# Altium PCB PCB_YMF288-M MegaMod v0.42_2023-11-11.pcbdoc
Units mil, origin at the board's own origin, x right, y up, seen from the top; angles counter-clockwise.
Board outline 3884.22 x 3759.95 mil, 2 copper layers (Top Layer, Bottom Layer); 34 components, 49 nets, 173 pads, 12 vias.
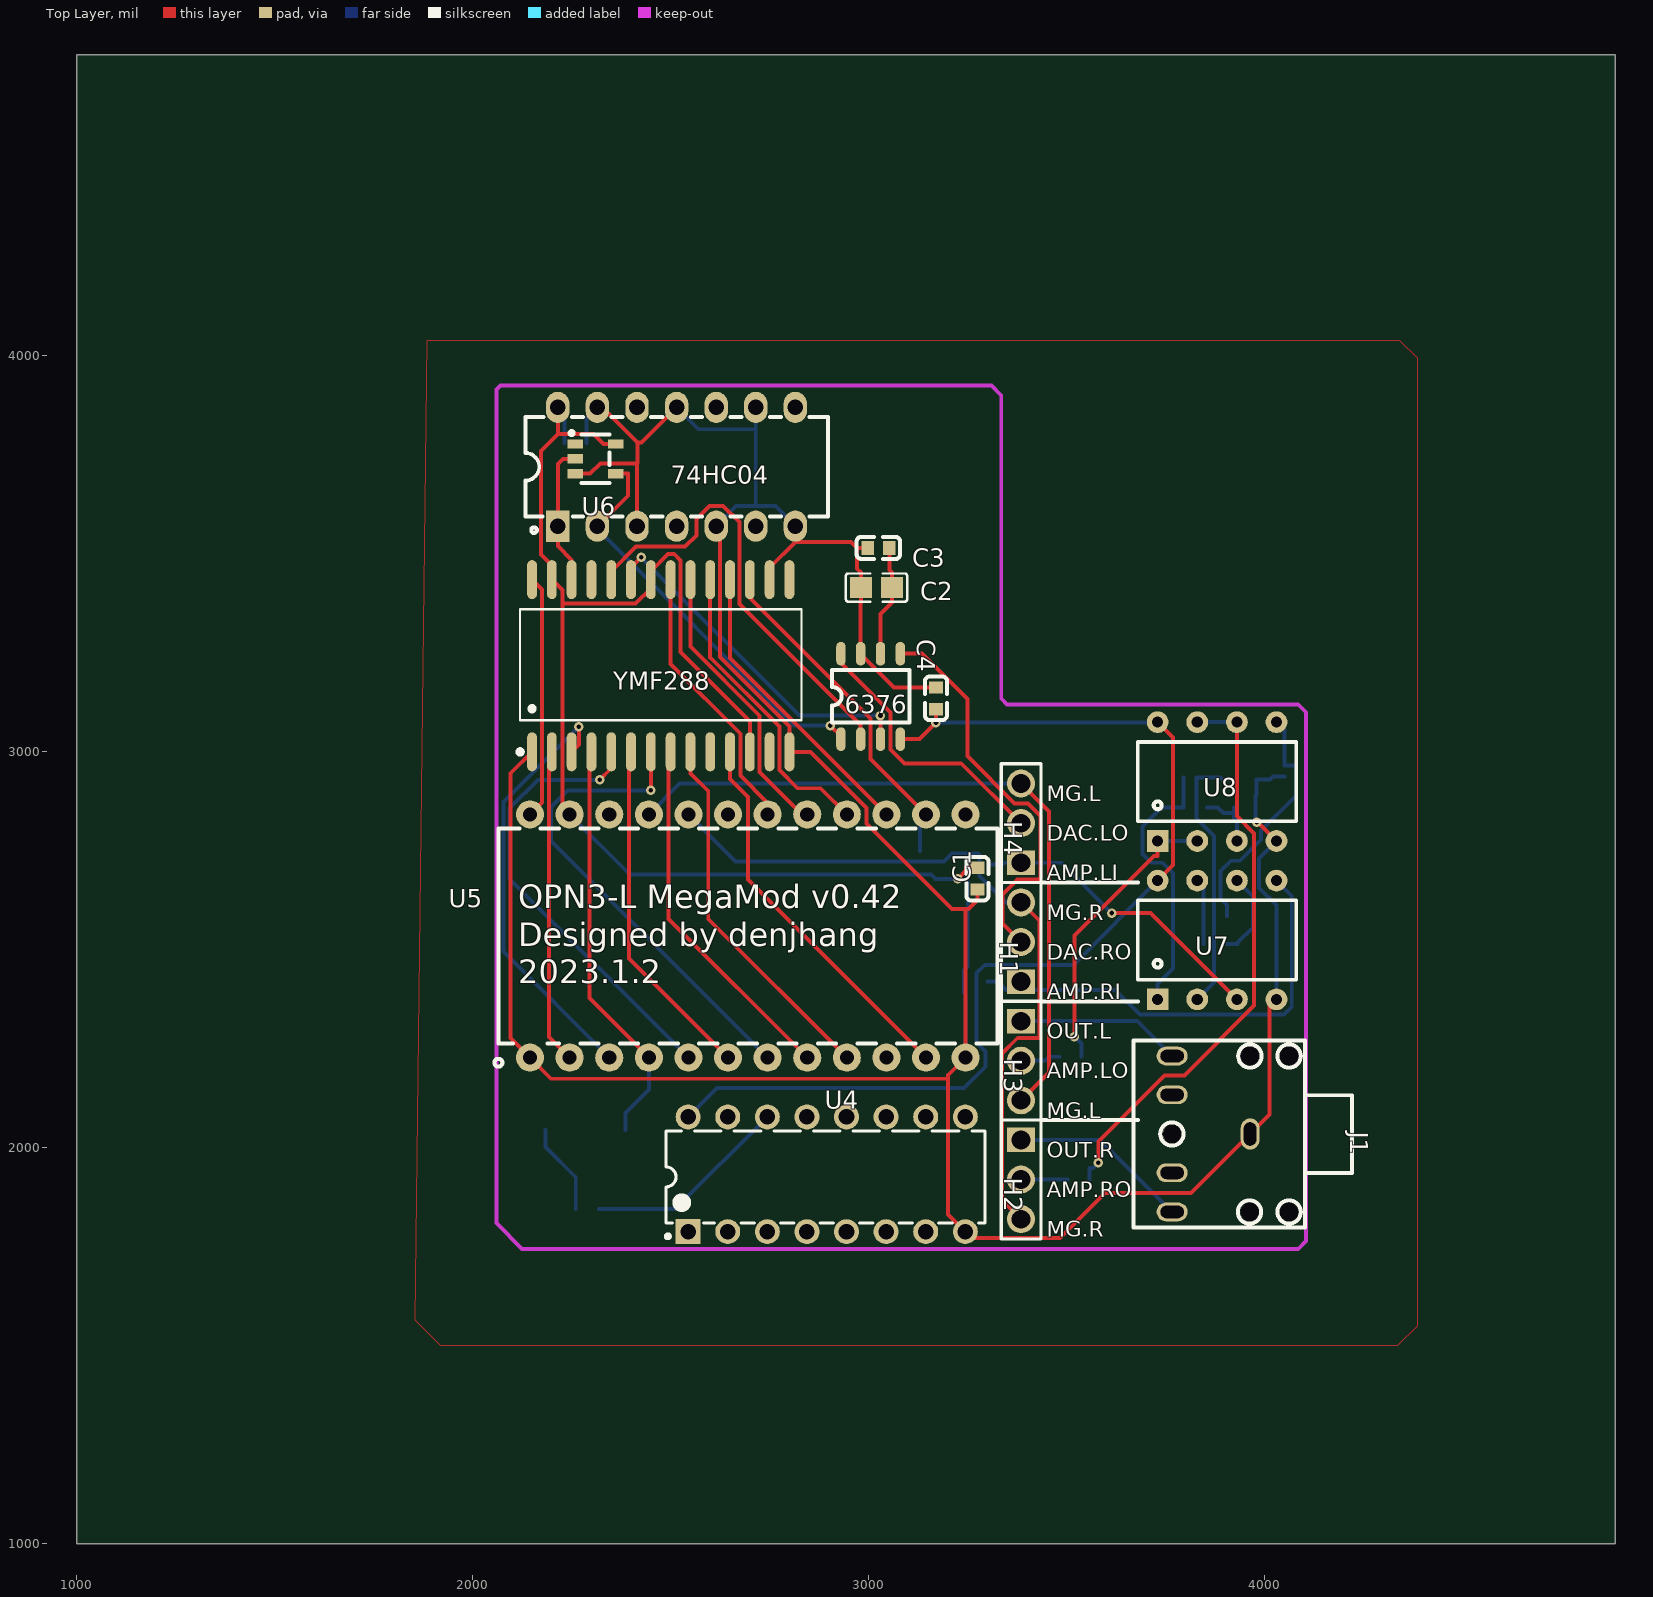
[diagram p0: Top Layer view]
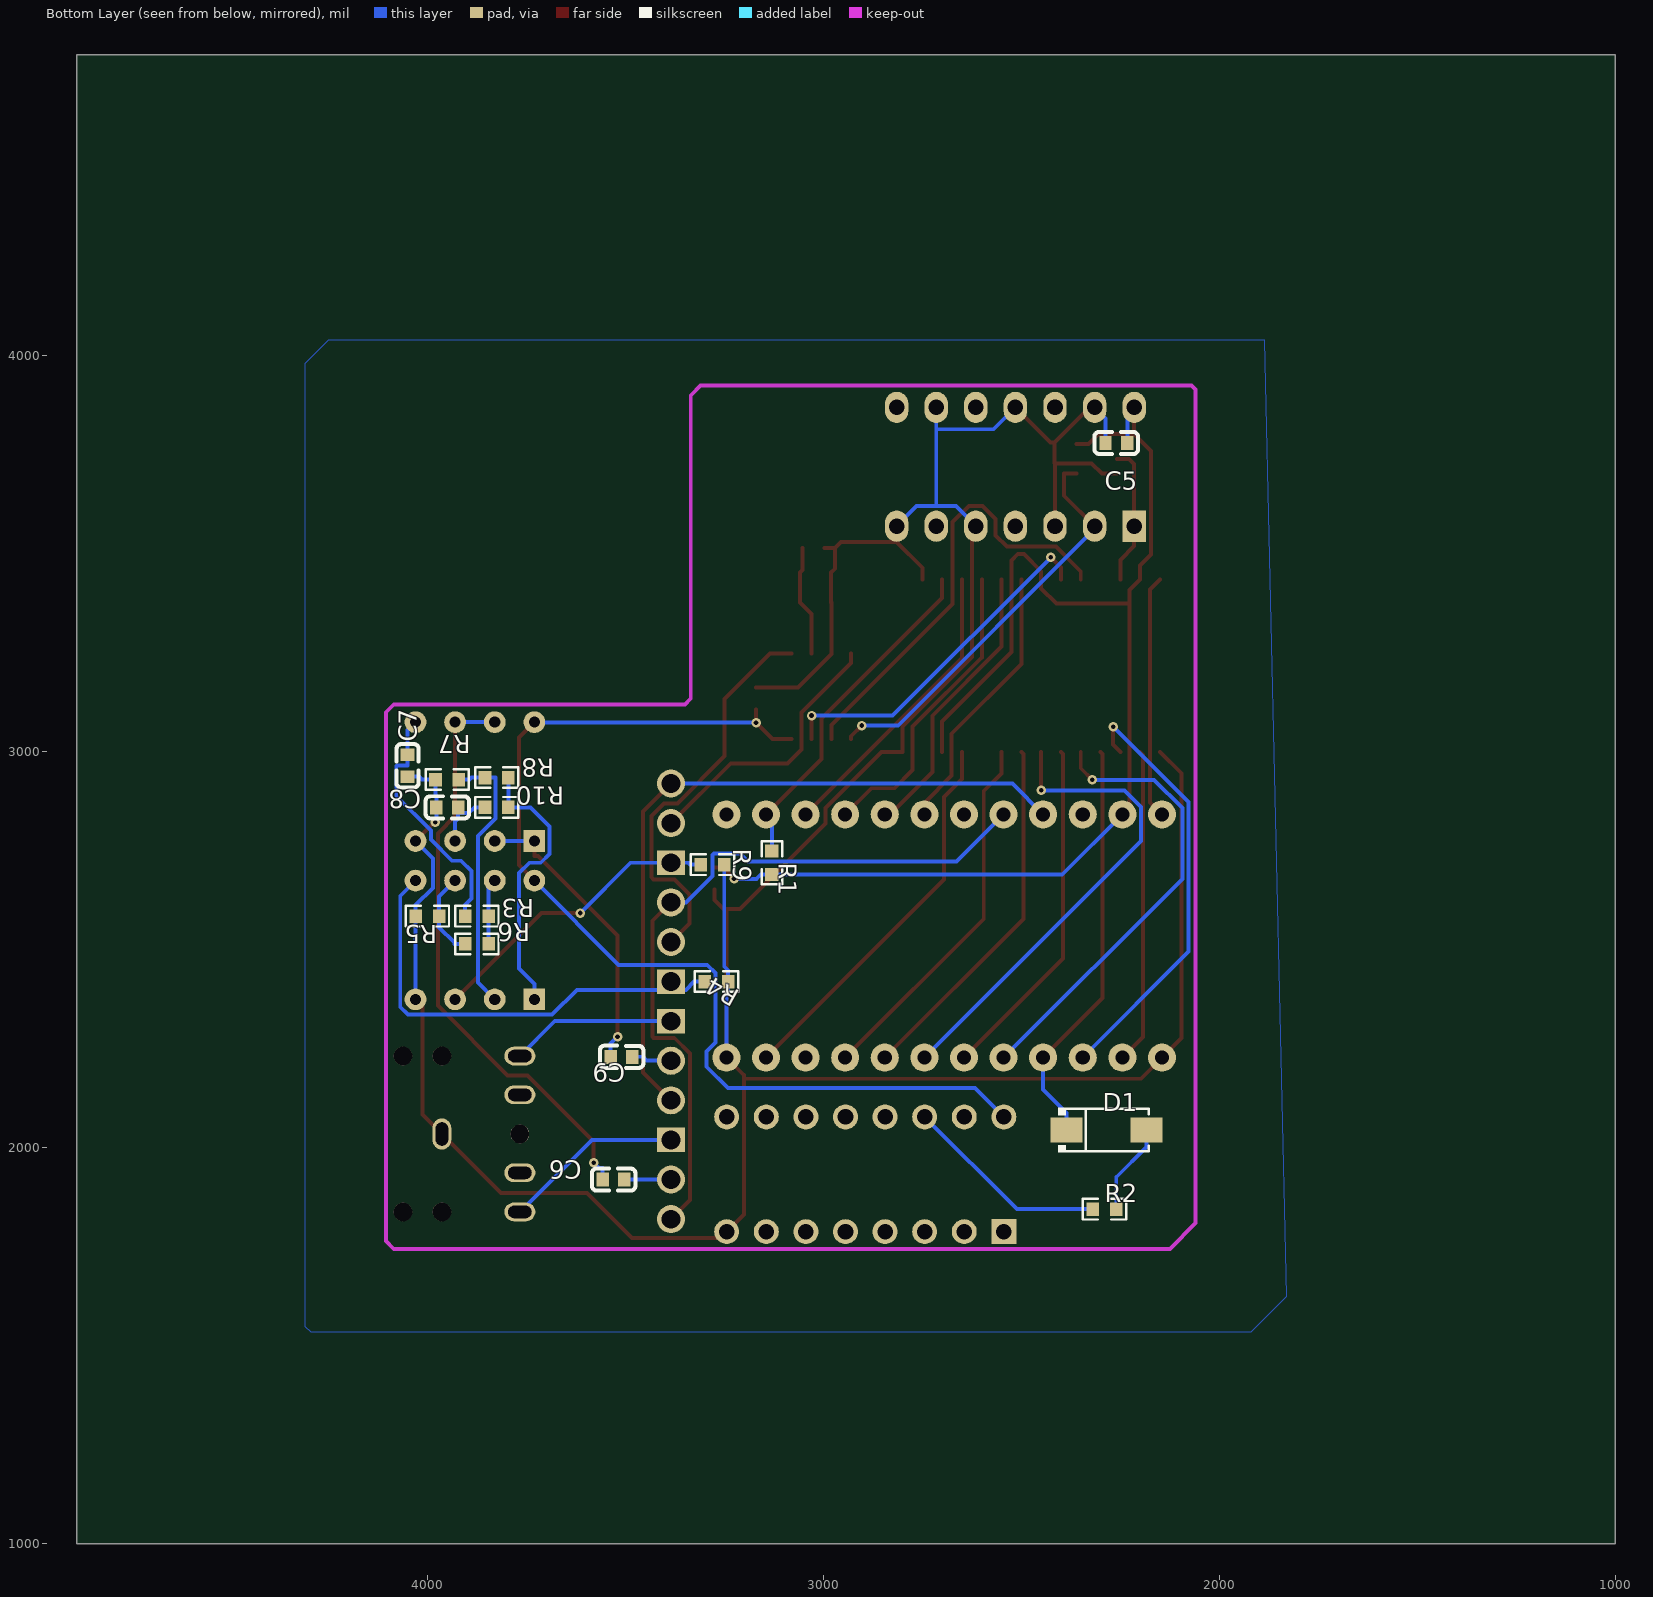
[diagram p1: Bottom Layer view, seen from below]

## Layer stack, top to bottom
Top Layer: signal copper (thickness not stored)
Dielectric: dielectric 12.6, FR-4, Dk 4.8
Bottom Layer: signal copper (thickness not stored)

## Board outline
4884.22,1000 1000,1000 1000,4759.95 4884.22,4759.95

## Components (designator, comment, footprint, x,y, rotation, side; value= is the part's Value field where it differs from the comment)
74HC04 "MegaGRRL IC-DCSG" DIP-14_L19.4-W6.4-P2.54-LS7.6-BL 2514.22,3720 r0 top
6376 "uPD6379GR" SOIC-8_L5.0-W4.0-P1.27-LS6.0-BL 3004.22,3140 r0 top
C1 "0.1u" C0603#1 3274.22,2680 r90 top
C2 "0.1u" C0805 3019.22,3415 r0 top
C3 "0.1u" C0603#1 3024.22,3515 r0 top
C4 "0.1u" C0603#1 3169.22,3135 r270 top
C5 "0.1u" C0603#2 2259.22,3780 r0 bottom
C6 "10n" C0603#2 3529.22,1920 r180 bottom
C7 "10n" C0603#2 4049.22,2965 r270 bottom
C8 "10n" C0603#2 3949.22,2860 r180 bottom
C9 "4.7u" C0603#2 3509.22,2230 r180 bottom
D1 "SS14" SMA_L4.4-W2.8-LS5.4-RD 2284.22,2045 r0 bottom
H1 "Header-Male-2.54_1x3" HDR-TH_3P-P2.54-V-M-1 3384.22,2520 r90 top
H2 "Header-Male-2.54_1x3" HDR-TH_3P-P2.54-V-M-1 3384.22,1920 r270 top
H3 "Header-Male-2.54_1x3" HDR-TH_3P-P2.54-V-M-1 3384.22,2220 r270 top
H4 "Header-Male-2.54_1x3" HDR-TH_3P-P2.54-V-M-1 3384.22,2820 r90 top
J1 "PJ-307C" AUDIO-TH_PJ307C 3864.22,2035 r270 top
R1 "62k" R0603 3129.22,2720 r90 bottom
R2 "1k" R0603 2289.22,1845 r0 bottom
R3 "3.6k" R0603 3874.22,2585 r180 bottom
R4 "10k" R0603 3269.22,2420 r180 bottom
R5 "15k" R0603 3999.22,2585 r180 bottom
R6 "3.9k" R0603 3874.22,2515 r180 bottom
R7 "15k" R0603 3949.22,2930 r180 bottom
R8 "3.9k" R0603 3824.22,2935 r180 bottom
R9 "10k" R0603 3279.22,2715 r0 bottom
R10 "3.6k" R0603 3824.22,2860 r180 bottom
U4 "MegaGRRL IC-DCSG" DIP-16_L20.4-W5.8-P2.54-LS7.6-BL 2893.42,1933.19 r0 top
U5 "MegaGRRL IC-FM" DIP-24_L32.0-W13.8-P2.54-LS15.6-BL 2694.22,2535 r0 top
U6 "SA5532AP" SOT-23-5_L3.0-W1.7-P0.95-LS2.8-BR 2309.22,3740 r180 top
U7 "SA5532AP" DIP8 3879.22,2525 r0 top
U8 "SA5532AP" DIP8 3879.22,2925 r0 top
YMF288 "YMF288-M" SOP-28-YMF288 2474.22,3220 r0 top
? "" ? 1780.61,3568.97 r0 top

## Footprints (in the part's own frame and the unit in brackets; to place one, negate y for a bottom-side part, rotate by r counter-clockwise, add the part's x,y. Pads: shape width x height; smd on the part's side, far side on the other; paste and mask are expansions set on the pad)
AUDIO-TH_PJ307C [mm]
  oval 2x1.2 hole 0.8 slot 1.5 at 0 deg paste+0 mask+0.051: 1(0,2.5)
  oval 1.2x2 hole 0.8 slot 1.5 at 90 deg paste+0 mask+0.051: 2(5,-2.5) 3(2.489,-2.5) 4(-2.511,-2.5) 5(-5,-2.5)
  round 1.2 hole 1.2 unplated paste+0: ""(-5,2.5) ""(-5,5) ""(0,-2.5) ""(5,2.5) ""(5,5)
  silkscreen extent -6.01,-4.99 5.99,9.03
C0603#1 [mm]
  rect 0.8x0.9 smd paste+0 mask+0.051: 1(-0.7,0) 2(0.7,0)
  silkscreen extent -1.41,-0.71 1.39,0.72
C0603#2 [mm]
  rect 0.8x0.9 smd paste+0 mask+0.051: 1(0.7,0) 2(-0.7,0)
  silkscreen extent -1.39,-0.72 1.41,0.71
C0805 [mm]
  rect 1.41x1.35 smd paste-100 mask+0.051: 1(-1,0) 2(1,0)
  silkscreen extent -1.96,-0.9 1.96,0.9
DIP8 [mil]
  rect 55x55 hole 28 paste+0 mask+2: 1(-150,-150)
  round 55 hole 28 paste+0 mask+2: 2(-50,-150) 3(50,-150) 4(150,-150) 5(150,150) 6(50,150) 7(-50,150) 8(-150,150)
  silkscreen extent -200,-100 200,100
DIP-14_L19.4-W6.4-P2.54-LS7.6-BL [mm]
  rect 1.5x2 hole 1 paste+0 mask+0.051: 1(-7.62,-3.811)
  oval 1.5x2 hole 1 paste+0 mask+0.051: 2(-5.08,-3.811) 3(-2.54,-3.811) 4(0,-3.811) 5(2.54,-3.811) 6(5.08,-3.811) 7(7.62,-3.811) 8(7.62,3.811) 9(5.08,3.809) 10(2.54,3.809) 11(0,3.809) 12(-2.54,3.809) 13(-5.08,3.809) 14(-7.62,3.809)
  silkscreen extent -9.7,-4.24 9.7,3.2
DIP-16_L20.4-W5.8-P2.54-LS7.6-BL [mm]
  rect 1.6x1.6 hole 1 paste+0 mask+0.051: 1(-8.89,-3.68)
  round 1.6 hole 1 paste+0 mask+0.051: 2(-6.35,-3.68) 3(-3.81,-3.68) 4(-1.27,-3.68) 5(1.27,-3.68) 6(3.81,-3.68) 7(6.35,-3.68) 8(8.89,-3.68) 9(8.89,3.68) 10(6.35,3.68) 11(3.81,3.68) 12(1.27,3.68) 13(-1.27,3.68) 14(-3.81,3.68) 15(-6.35,3.68) 16(-8.89,3.68)
  silkscreen extent -10.31,-4.1 10.16,2.77
DIP-24_L32.0-W13.8-P2.54-LS15.6-BL [mm]
  round 1.8 hole 0.9 paste+0 mask+0.051: 1(-13.97,-7.8) 2(-11.43,-7.8) 3(-8.89,-7.8) 4(-6.35,-7.8) 5(-3.81,-7.8) 6(-1.27,-7.8) 7(1.27,-7.8) 8(3.81,-7.8) 9(6.35,-7.8) 10(8.89,-7.8) 11(11.43,-7.8) 12(13.97,-7.8) 13(13.97,7.8) 14(11.43,7.8) 15(8.89,7.8) 16(6.35,7.8) 17(3.81,7.8) 18(1.27,7.8) 19(-1.27,7.8) 20(-3.81,7.8) 21(-6.35,7.8) 22(-8.89,7.8) 23(-11.43,7.8) 24(-13.97,7.8)
  silkscreen extent -16.26,-8.38 16,6.9
HDR-TH_3P-P2.54-V-M-1 [mm]
  rect 1.575x1.8 hole 1.2 paste+0 mask+0.051: 1(-2.54,0)
  round 1.8 hole 1.2 paste+0 mask+0.051: 2(0,0) 3(2.54,0)
  silkscreen extent -3.81,-1.27 3.81,1.27
R0603 [mil]
  rect 31.75x34.02 smd paste-3937.01 mask+2: 1(29.66,0) 2(-29.66,0)
  silkscreen extent -55,-26 55,26
SMA_L4.4-W2.8-LS5.4-RD [mm]
  rect 2.046x1.62 smd paste+0 mask+0.051: 1(2.566,0) 2(-2.565,0)
  silkscreen extent -2.7,-1.44 3.08,1.44
SOIC-8_L5.0-W4.0-P1.27-LS6.0-BL [mm]
  oval 0.6x1.52 smd paste+0 mask+0.102: 1(-1.905,-2.74) 2(-0.635,-2.74) 3(0.635,-2.74) 4(1.905,-2.74) 5(1.905,2.74) 6(0.635,2.74) 7(-0.635,2.74) 8(-1.905,2.74)
  silkscreen extent -2.49,-1.67 2.5,1.7
SOP-28-YMF288 [mm]
  oval 0.63x2.5 smd paste+0 mask+0.051: 1(-8.255,-5.588) 2(-6.985,-5.588) 3(-5.715,-5.588) 4(-4.445,-5.588) 5(-3.175,-5.588) 6(-1.905,-5.588) 7(-0.635,-5.588) 8(0.635,-5.588) 9(1.905,-5.588) 10(3.175,-5.588) 11(4.445,-5.588) 12(5.715,-5.588) 13(6.985,-5.588) 14(8.255,-5.588) 15(8.255,5.461) 16(6.985,5.461) 17(5.715,5.461) 18(4.445,5.461) 19(3.175,5.461) 20(1.905,5.461) 21(0.635,5.461) 22(-0.635,5.461) 23(-1.905,5.461) 24(-3.175,5.461) 25(-4.445,5.461) 26(-5.715,5.461) 27(-6.985,5.461) 28(-8.255,5.461)
  silkscreen extent -9.17,-5.74 9.03,3.57
SOT-23-5_L3.0-W1.7-P0.95-LS2.8-BR [mm]
  rect 1x0.6 smd paste+0 mask+0.051: 1(1.3,-0.95) 2(1.3,0) 3(1.3,0.95) 4(-1.3,0.95) 5(-1.3,-0.95)
  silkscreen extent -0.9,-1.78 1.65,1.55
? [mil]

## Via types
v1: diameter 24.02, hole 12.01, Top Layer to Bottom Layer, tented both sides, 12 vias

## Nets (pads, with @x,y where several pads share a name; then routed paths per layer and width w, separated by ;. In a path a pad name is that pad's centre, name@x,y a point inside that pad or via, vN(x,y) a via of type N, cw(c..) or ccw(c..) an arc to the next point about the centre after c; other vN are vias at no path point)
/CS: R1.1 U5.14 YMF288.17 | length 875.9
  Top Layer w10: YMF288.17 2699.22,3388.87 3004.22,3083.87 3004.22,2982.09 U5.14
  Bottom Layer w10: R1.1 3129.22,2827.09 U5.14
/IC: U5.11 YMF288.11 | length 977.1
  Top Layer w10: YMF288.11 2649.22,2931.28 2694.22,2886.28 2694.22,2677.91 U5.11
/LRO: 74HC04.2 6376.1 U6.4 | length 1041.6
  Top Layer w10: 74HC04.2 2391.08,3646.84 2391.08,3702.6 U6.4 ; v1(2902.15,3066.46) 2929.22,3039.39 6376.1
  Bottom Layer w10: 74HC04.2 2314.22,3562.44 2810.2,3066.46 v1(2902.15,3066.46)
/RD: U5.16 YMF288.19 | length 770
  Top Layer w10: YMF288.19 2599.22,3238.85 2774.22,3063.85 2774.22,2953.73 2819.84,2908.11 2878.2,2908.11 U5.16
/WR: U5.15 YMF288.18 | length 756.5
  Top Layer w10: YMF288.18 2649.22,3237.09 U5.15
A0: U5.17 YMF288.20 | length 722.7
  Top Layer w10: YMF288.20 2549.22,3266.16 2724.22,3091.16 2724.22,2949.14 2831.27,2842.09 U5.17
A1: U5.18 YMF288.21 | length 694.4
  Top Layer w10: YMF288.21 2499.22,3222.26 2675.78,3045.7 2675.78,2939.84 2744.22,2871.4 U5.18
A.VCC: 6376.4 C4.2 U4.16 U7.8 U8.8 | length 2737.8
  Top Layer w10: 6376.4 3127.7,3032.13 v1(3169.22,3073.65) 3169.22,3080.7 C4.2 ; U7.8 3768.02,2713.8 3768.02,3036.2 U8.8
  Bottom Layer w10: U4.16 2615.95,2150.6 3240.61,2150.6 3294.85,2204.84 3294.85,2243.65 3271.96,2266.54 3271.96,2441.57 3292.51,2462.12 3516.34,2462.12 U7.8 ; v1(3169.22,3073.65) 3727.87,3073.65 U8.8
BCO: 6376.3 YMF288.23 | length 896.3
  Top Layer w10: YMF288.23 2399.22,3465.61 v1(2424.92,3491.31) ; 6376.3 v1(3029.22,3091.64)
  Bottom Layer w10: v1(2424.92,3491.31) 2824.59,3091.64 v1(3029.22,3091.64)
C7_2: C7.2 R3.2 U8.5 | length 625.1
  Bottom Layer w10: R3.2 3903.88,2613 3887.52,2629.36 3887.52,2698.65 3913.87,2725 3937.07,2725 3990.68,2778.61 3990.68,2801.15 4077.98,2888.45 4077.98,2963.8 4075.96,2965.82 4049.22,2965.82 C7.2 4049.22,3055 U8.5
C8_1: C8.1 R10.2 U8.3 | length 161.9
  Bottom Layer w10: R10.2 3880.74,2860 3895.09,2845.65 C8.1@3921.66,2845.65 ; C8.1 C8.1@3921.66,2845.65 ; U8.3 3929.22,2823.73 3921.66,2831.29 C8.1@3921.66,2845.65
D0: U5.2 YMF288.2 | length 796.8
  Top Layer w10: YMF288.2 2191.89,2992.67 2191.89,2280.24 U5.2
D1: U5.3 YMF288.3 | length 1096.4
  Top Layer w10: YMF288.3 2267.43,3018.21 v1(2267.43,3063.52)
  Bottom Layer w10: v1(2267.43,3063.52) 2076.75,2872.84 2076.75,2495.38 U5.3
D1_2: D1.2 R2.2 | length 231.6
  Bottom Layer w10: D1.2 2183.22,2002.12 2259.56,1925.78 R2.2
D2: D1.1 U5.4 YMF288.4 | length 1043.6
  Top Layer w10: YMF288.4 2294.22,2995 2294.22,2377.91 U5.4
  Bottom Layer w10: D1.1 2385.22,2087.88 2444.22,2146.88 U5.4
D3: U5.5 YMF288.5 | length 1156.6
  Top Layer w10: v1(2319.92,2929.38) 2349.22,2958.68 YMF288.5
  Bottom Layer w10: v1(2319.92,2929.38) 2163.98,2929.38 2092.79,2858.19 2092.79,2679.34 U5.5
D4: U5.6 YMF288.6 | length 877.7
  Top Layer w10: YMF288.6 2394.22,2995 2394.22,2477.91 U5.6
D5: U5.7 YMF288.7 | length 1226.1
  Top Layer w10: v1(2449.22,2902.96) YMF288.7
  Bottom Layer w10: v1(2449.22,2902.96) 2238.97,2902.96 2197.3,2861.29 2197.3,2774.83 U5.7
D6: U5.8 YMF288.8 | length 919.1
  Top Layer w10: YMF288.8 2494.22,2995 2494.22,2577.91 U5.8
D7: U5.9 YMF288.9 | length 935.7
  Top Layer w10: YMF288.9 2549.22,2945.64 2594.22,2900.64 2594.22,2577.91 U5.9
DO: 6376.2 YMF288.24 | length 1128.9
  Top Layer w10: YMF288.24 2349.22,3455.5 2412.14,3518.42 2535.89,3518.42 2564.2,3546.73 2564.2,3587.9 2597.74,3621.44 2631.3,3621.44 2672.66,3580.08 2672.66,3373.95 2979.22,3067.39 6376.2
GND: 74HC04.3 74HC04.5 74HC04.7 74HC04.9 74HC04.11 74HC04.13 6376.7 C1.1 C2.1 C3.1 C4.1 C5.1 C7.1 C8.2 J1.1 R4.1 R5.2 R7.2 R9.2 U4.8 U5.1 U5.12 U6.3 U7.4 U8.4 YMF288.1 YMF288.14 YMF288.16 | length 8788.9
  Top Layer w10: YMF288.1 2095.19,2945.97 2095.19,2276.94 U5.1 2197.6,2174.53 3199.69,2174.53 ; U6.3 2295.64,3702.6 2321.62,3728.58 2414.22,3728.58 ; 74HC04.13 2327.47,3869.98 2415.66,3781.79 ; 74HC04.3 2414.22,3728.58 ; 74HC04.11 2426.03,3781.79 2415.66,3781.79 ; 74HC04.5 2624.22,3559.98 2624.22,3239.4 2799.22,3064.4 YMF288.14 2852.17,3000 2994.22,2857.95 2994.22,2818.99 3210.08,2603.13 3244.22,2603.13 ; YMF288.16 2749.22,3465.02 2814.22,3530.02 ; 74HC04.7 2814.22,3530.02 ; C3.1 2969.92,3515 ; C4.1 3063.51,3162.56 2979.22,3246.85 6376.7 2979.22,3376.81 2979.85,3377.44 2979.85,3396.22 C2.1 2979.85,3452.57 2969.92,3462.5 2969.92,3515 ; C1.1 3274.22,2625.7 3251.65,2603.13 3244.22,2603.13 ; v1(3979.3,2822.39) 3981.83,2822.39 U8.4 ; U7.4 4011.87,2357.65 4011.87,2084.22 J1.1 3813.5,1885.85 3596.49,1885.85 3482.81,1772.17 3259.56,1772.17 U4.8 3199.69,1832.04 3199.69,2174.53 ; 2414.22,3728.58 2415.66,3730.02 2415.66,3781.79 ; 2814.22,3530.02 2954.9,3530.02 2969.92,3515 ; 3199.69,2174.53 3199.69,2183.38 U5.12 3244.22,2603.13
  Bottom Layer w10: C5.1 2286.78,3842.54 74HC04.13 ; 74HC04.11 2569.46,3814.74 2714.22,3814.74 ; 74HC04.5 2664.62,3620.38 2714.22,3620.38 ; 74HC04.9 2714.22,3814.74 ; 74HC04.7 2763.82,3620.38 2714.22,3620.38 ; U5.12 3244.22,2387.34 3239.56,2392 R4.1 3239.56,2448 3249.56,2458 R9.2 ; v1(3979.3,2822.39) 3976.78,2824.91 C8.2 3976.78,2888.71 3978.88,2890.81 R7.2 4013.07,2930 4020.51,2937.44 C7.1 ; U7.4 4028.88,2375.34 R5.2 4028.88,2613 3985.44,2656.44 3985.44,2731.22 U8.4 ; 2714.22,3620.38 2714.22,3814.74
H2_2: C6.1 H2.2 | length 117.4
  Bottom Layer w10: H2.2 C6.1
H3_2: C9.1 H3.2 | length 101.6
  Bottom Layer w10: H3.2 3444.92,2220 3454.92,2230 C9.1
IN.L: H3.3 H4.3 U5.21 | length 1830.7
  Top Layer w10: H3.3 3454.73,2190.51 3454.73,2849.49 H4.3
  Bottom Layer w10: U5.21 2522.13,2920 H4.3
IN.R: H1.3 H2.3 U5.20 | length 1888.6
  Top Layer w10: H2.3 3336.34,1867.88 3336.34,2238.42 3375.88,2277.96 3427.78,2277.96 3430.69,2280.87 3430.69,2573.53 H1.3
  Bottom Layer w10: U5.20 2663.57,2722.74 3189.96,2722.74 3210.27,2743.05 3276.14,2743.05 3279.05,2740.14 3279.05,2686.81 3345.86,2620 H1.3
LOUT: 6376.8 H4.2 | length 700.4
  Top Layer w10: 6376.8 2929.22,3224.23 3054.28,3099.17 3054.28,3006.5 3089.74,2971.04 3233.18,2971.04 H4.2
LRO: 74HC04.1 U6.2 YMF288.26 | length 355.6
  Top Layer w10: YMF288.26 2249.22,3484.62 2214.22,3519.62 74HC04.1 2214.22,3726.86 2227.36,3740 U6.2
MCLK: U5.24 YMF288.28 | length 615.7
  Top Layer w10: U5.24 2174.22,2872.09 2174.22,3410 YMF288.28
OUT.L: H3.1 J1.5 | length 418.1
  Bottom Layer w10: H3.1 3677.65,2320 J1.5
OUT.R: H2.1 J1.2 | length 456.9
  Bottom Layer w10: H2.1 3583.95,2020 J1.2
R2_1: R2.1 U4.14 | length 521.1
  Bottom Layer w10: R2.1 2510.35,1845 U4.14
R3_1: R3.1 R6.1 U7.7 | length 166.4
  Bottom Layer w10: U7.7 3844.56,2659.66 R3.1 R6.1
R10_1: R8.1 R10.1 U7.1 | length 700.9
  Bottom Layer w10: U7.1 3729.22,2413.49 3768.25,2452.52 3768.25,2693.62 3741.85,2720.02 3713.07,2720.02 3690.68,2742.41 3690.68,2812.03 3738.65,2860 R10.1 3794.56,2907 R8.1
ROUT: 6376.5 H1.2 | length 1016.1
  Top Layer w10: 6376.5 3133.89,3247.87 3248.75,3133.01 3248.75,2989.29 3368.04,2870 3401.44,2870 3433.23,2838.21 3433.23,2683.33 3427.78,2677.88 3375.12,2677.88 3337.35,2640.11 3337.35,2566.87 H1.2
S$20340: 
S$25961: 
S$25965: 
S$25969: 
S$25976: 
S$26503: 
U1_6: 6376.6 C2.2 C3.2 | length 282.1
  Top Layer w10: 6376.6 3029.22,3348.07 3058.59,3377.44 C2.2 3058.59,3452.57 3051.78,3459.38 C3.2
U7_2: R7.1 R8.2 U7.2 | length 690.6
  Bottom Layer w10: U7.2 3871.48,2417.26 3871.48,2787.27 3826.96,2831.79 3826.96,2934.95 3827.01,2935 R8.2 3887.7,2935 3892.7,2930 R7.1
U7_3: H4.1 R9.1 U7.3 | length 767
  Top Layer w10: v1(3613.04,2592.93) 3711.29,2592.93 U7.3
  Bottom Layer w10: R9.1 3335.74,2715 3337.8,2717.06 3337.8,2720 H4.1 3485.97,2720 v1(3613.04,2592.93)
U7_5: H1.1 R4.2 U7.5 | length 1168.3
  Bottom Layer w10: R4.2 3325.74,2420 3346.73,2399.01 H1.1@3384.22,2399.01 ; H1.1 H1.1@3384.22,2399.01 ; U7.5 4067.85,2636.37 4067.85,2355.32 4048.75,2336.22 3684.12,2336.22 3621.33,2399.01 H1.1@3384.22,2399.01
U7_6: R5.1 R6.2 U7.6 | length 219.6
  Bottom Layer w10: R6.2 3930.74,2515 3930.74,2518.18 3969.56,2557 R5.1 3969.56,2634.66 U7.6
U8_1: C9.2 U8.1 U8.2 | length 745
  Top Layer w10: v1(3519.06,2280.84) 3519.06,2535.97 3719.6,2736.51 3729.22,2736.51 U8.1
  Bottom Layer w10: v1(3519.06,2280.84) 3536.78,2263.12 C9.2 ; U8.1 U8.2
U8_6: C6.2 U8.6 U8.7 | length 1480.4
  Top Layer w10: v1(3579.45,1962.07) 3579.45,2015.82 3746.48,2182.85 3796.66,2182.85 3972.97,2359.16 3972.97,2793.96 3929.22,2837.71 U8.6
  Bottom Layer w10: C6.2 3556.78,1948.71 3566.09,1948.71 v1(3579.45,1962.07) ; U8.7 U8.6
VCC: 74HC04.14 C1.2 C5.2 R1.2 U5.23 U6.5 YMF288.12 YMF288.22 YMF288.27 | length 3381
  Top Layer w10: 74HC04.14 2214.22,3802.68 ; U5.23 2225.78,2860.53 2225.78,3374.25 ; U6.5 2329.73,3777.4 2304.45,3802.68 2214.22,3802.68 ; YMF288.12 2699.22,3077.22 2524.21,3252.23 2524.21,3483.54 2508.37,3499.38 2492.5,3499.38 2449.22,3456.1 YMF288.22 2449.22,3412.71 2410.76,3374.25 2225.78,3374.25 ; v1(3224.76,2679.52) 3245.51,2700.27 3245.51,2707.56 C1.2 ; 2214.22,3802.68 2171.64,3760.1 2171.64,3498.01 2199.22,3470.43 YMF288.27 2225.78,3408.44 2225.78,3374.25
  Bottom Layer w10: 74HC04.14 2231.66,3852.54 C5.2 ; U5.23 2395.97,2690.34 R1.2 3157.22,2690.34 3168.04,2679.52 v1(3224.76,2679.52)
pads on no net: 74HC04.4 74HC04.6 74HC04.8 74HC04.10 74HC04.12 J1. J1.3 J1.4 U4.1 U4.2 U4.3 U4.4 U4.5 U4.6 U4.7 U4.9 U4.10 U4.11 U4.12 U4.13 U4.15 U5.10 U5.13 U5.19 U5.22 U6.1 YMF288.10 YMF288.13 YMF288.15 YMF288.25

## Polygon pours and split planes (outlines as drawn)
GND on Bottom Layer (solid): 1884.22,4040 4249.22,4040 4309.22,3980 4309.22,1550 4294.22,1535 1919.22,1535 1829.22,1625
GND on Top Layer (solid): 1884.22,4040 4339.22,4040 4384.22,3995 4384.22,1550 4334.22,1500 1919.22,1500 1854.22,1565

## Silkscreen, mask and mechanical layers (free items; w line width, h text height)
Top Overlay:
  lines w10 net S$26503: 3434.22,2070 3679.22,2070 ; 3434.22,2370 3679.22,2370 ; 3434.22,2670 3679.22,2670
  text "MG.L" at 3449.22,2875.32 h39.37
  text "DAC.LO" at 3449.22,2775.32 h39.37
  text "AMP.LI" at 3449.22,2675.32 h39.37
  text "OPN3-L MegaMod v0.42" at 2114.22,2605.47 h59.05
  text "MG.R" at 3449.22,2575.32 h39.37
  text "Designed by denjhang" at 2114.22,2509.62 h59.05
  text "DAC.RO" at 3449.22,2475.32 h39.37
  text "2023.1.2" at 2114.22,2415.47 h59.05
  text "AMP.RI" at 3449.22,2375.32 h39.37
  text "OUT.L" at 3449.22,2275.32 h39.37
  text "AMP.LO" at 3449.22,2175.32 h39.37
  text "MG.L" at 3449.22,2075.32 h39.37
  text "OUT.R" at 3449.22,1975.32 h39.37
  text "AMP.RO" at 3449.22,1875.32 h39.37
  text "MG.R" at 3449.22,1775.32 h39.37